# Altium PCB Merge_ESC_Board.PcbDoc (part 1 of 2)
Units mil, origin at the board's own origin, x right, y up, seen from the top; angles counter-clockwise.
Board outline 6950 x 3750 mil, 4 copper layers (Top Layer, Signal Layer 1, Signal Layer 2, Bottom Layer), stack 62.2 mil thick; 151 components, 93 nets, 546 pads, 134 vias.
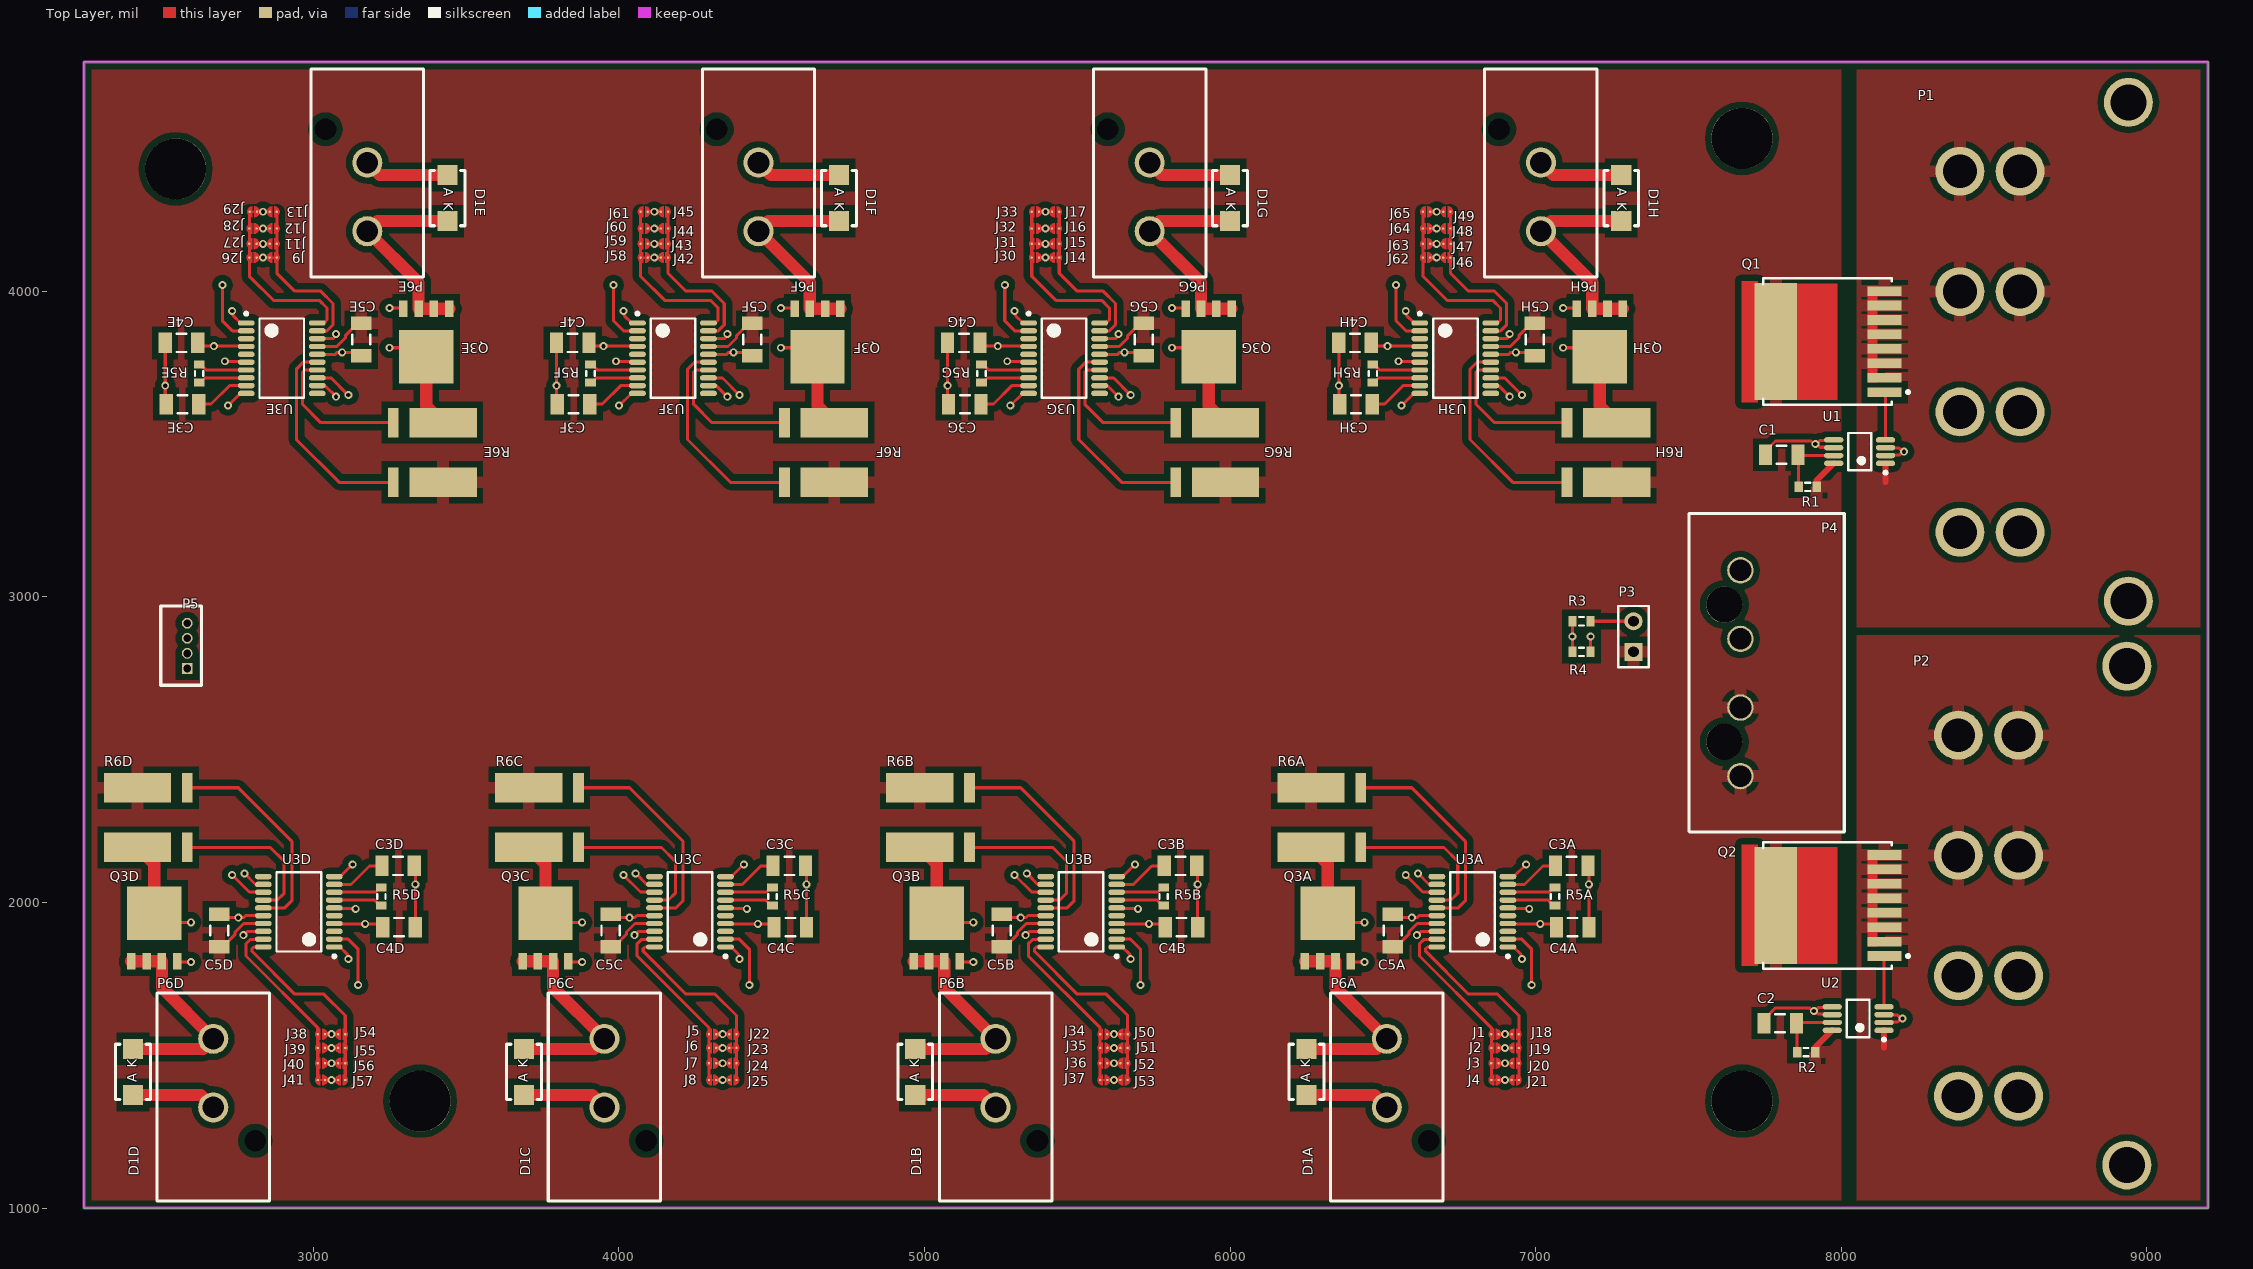
[diagram p0: Top Layer view]
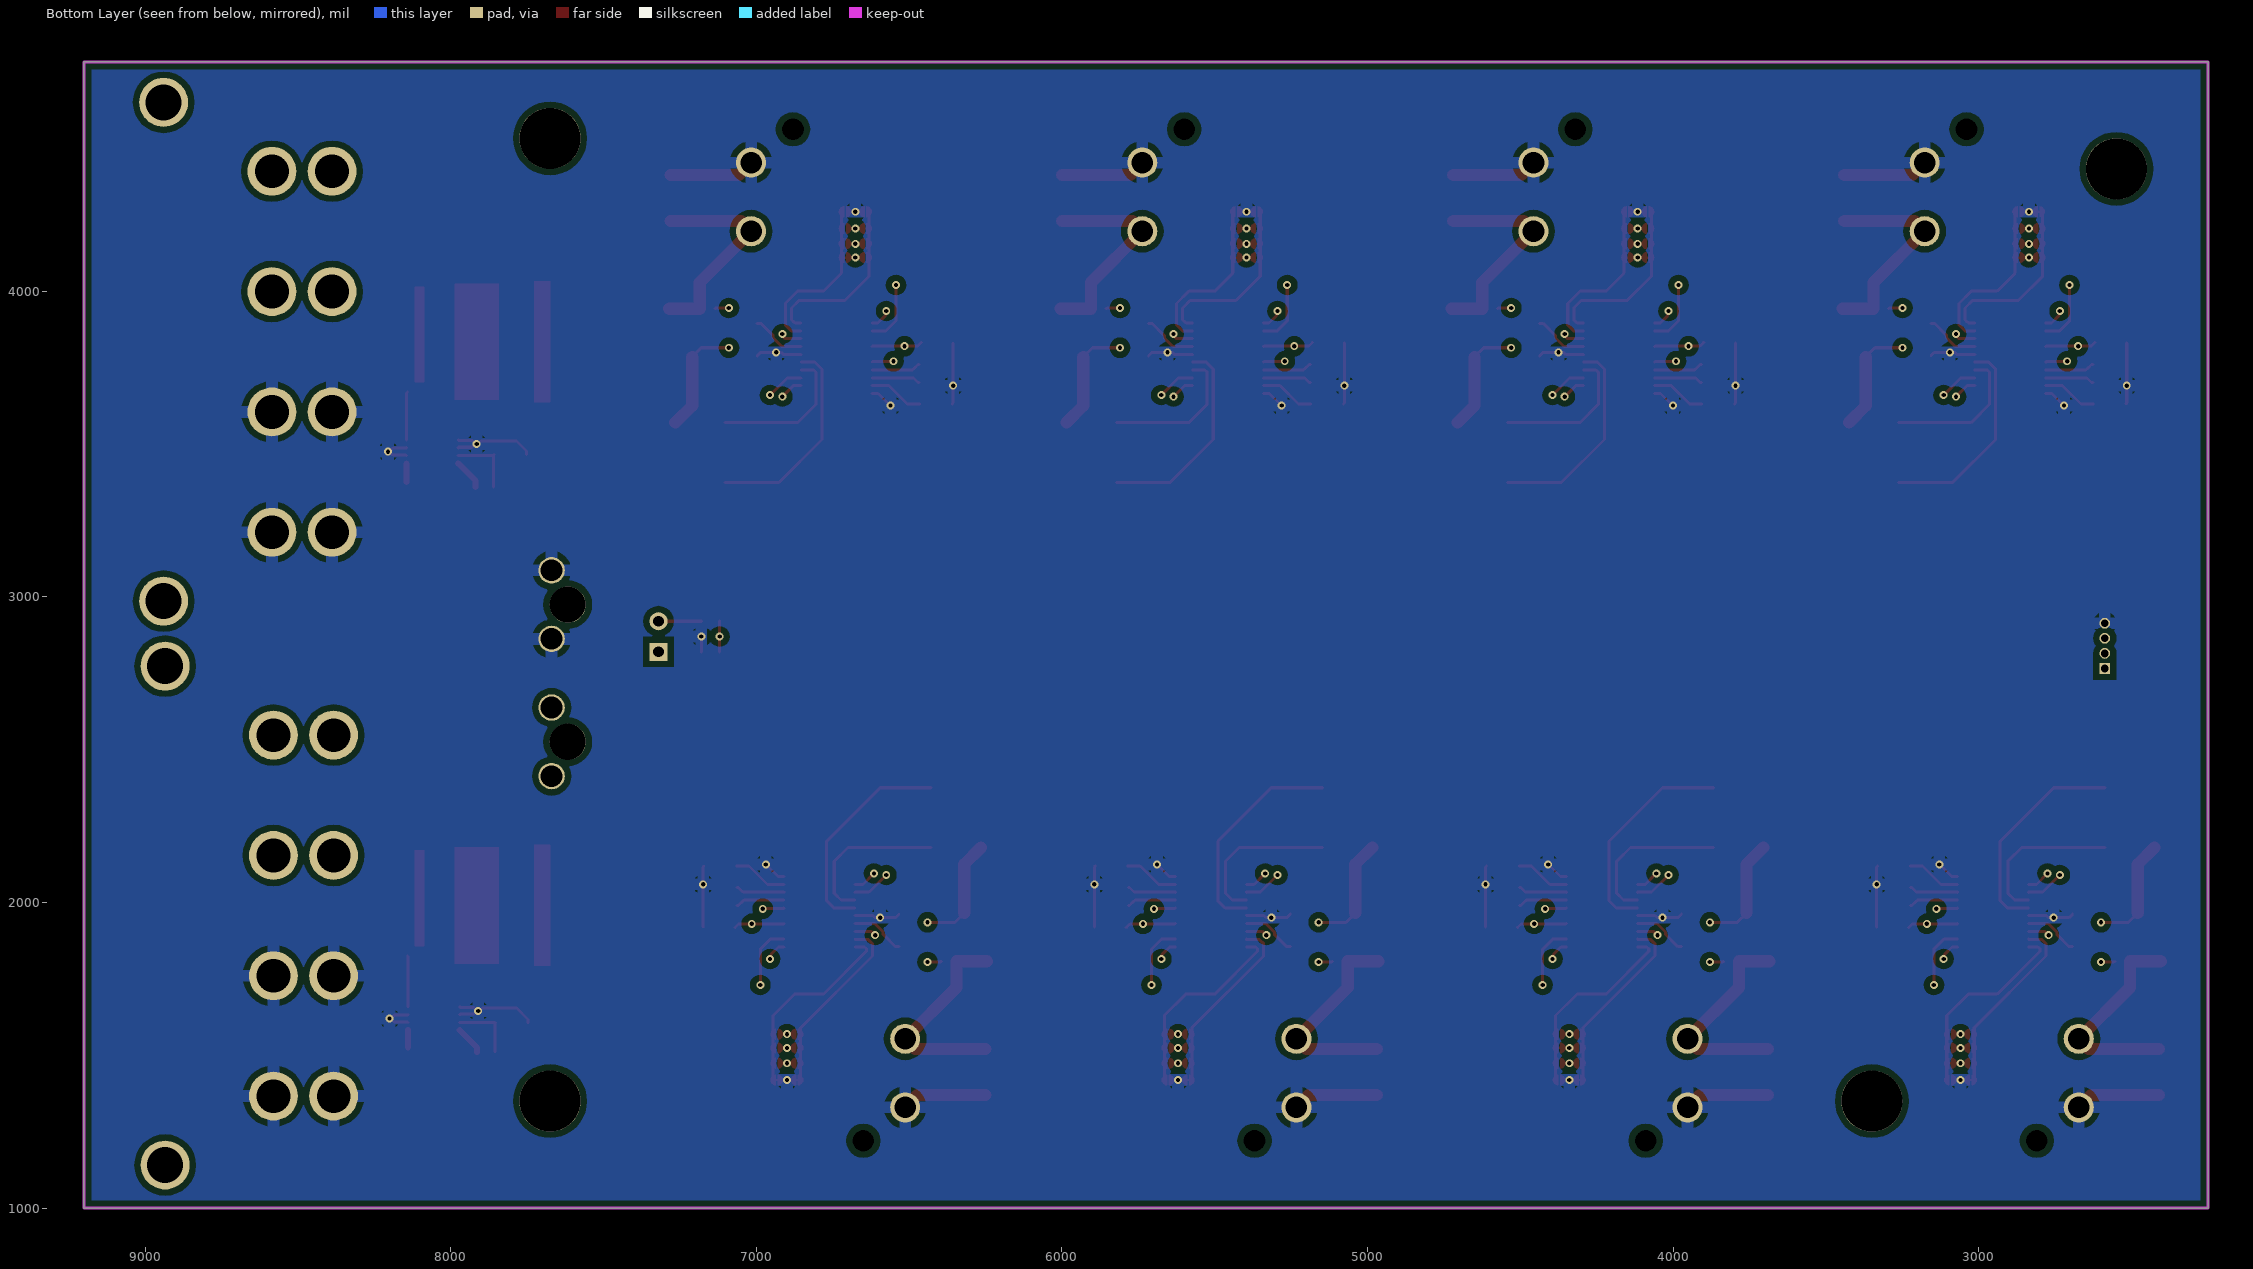
[diagram p1: Bottom Layer view, seen from below]
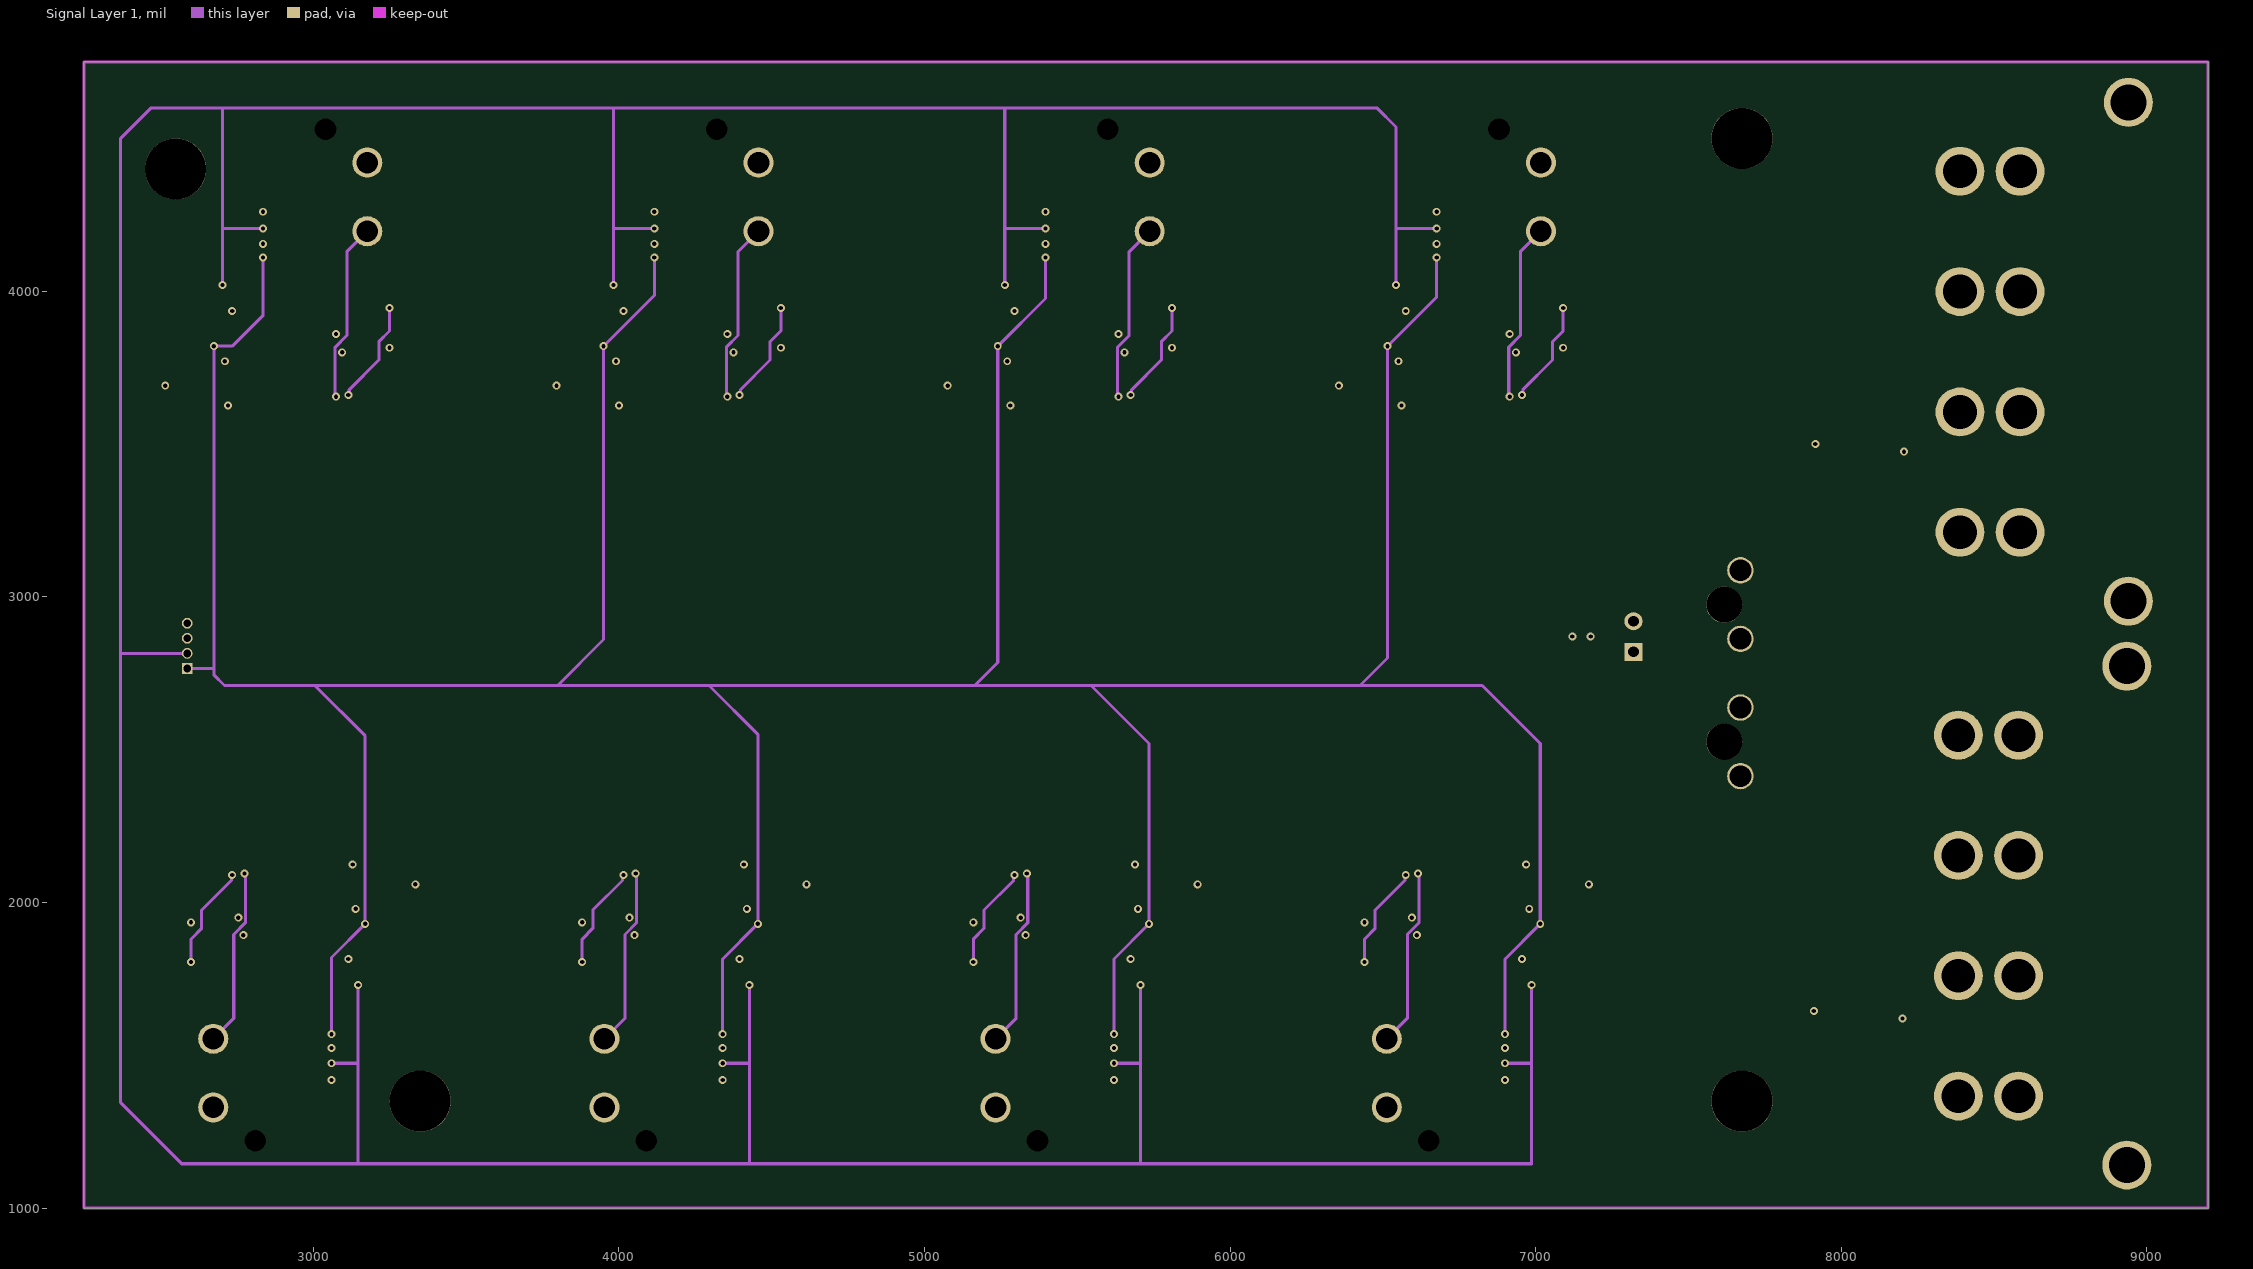
[diagram p2: Signal Layer 1]
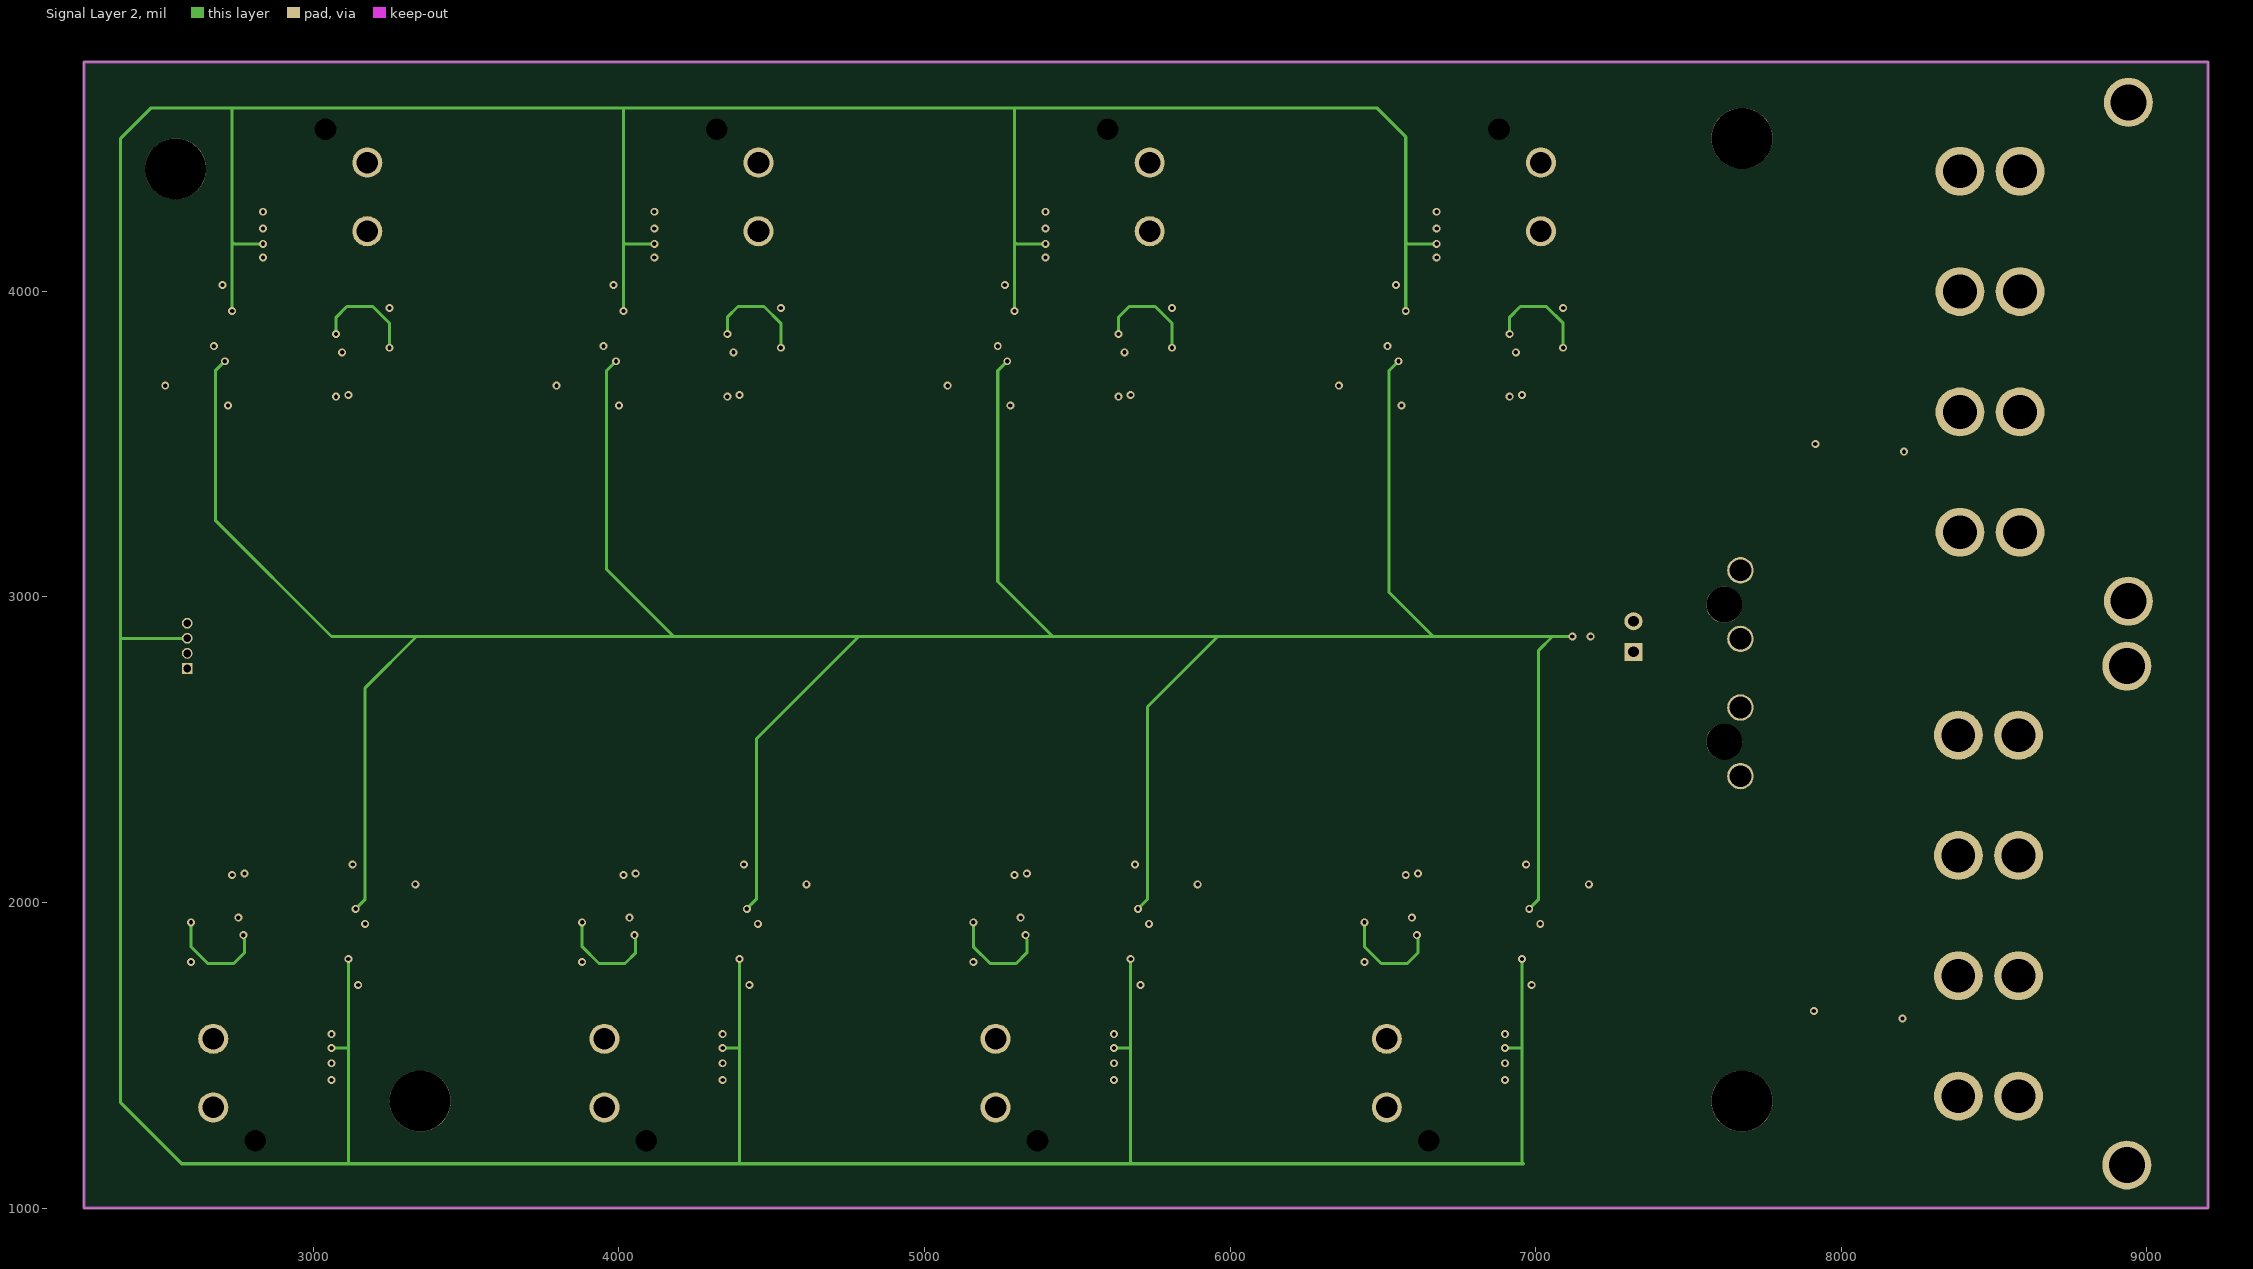
[diagram p3: Signal Layer 2]

## Layer stack, top to bottom
Top Solder: solder mask 0.4, Solder Resist, Dk 3.5
Top Layer: signal copper 1.4
Dielectric 1: core 8, FR-4, Dk 4.6
Signal Layer 1: signal copper 0.7
Dielectric 3: prepreg 42, Dk 4.6
Signal Layer 2: signal copper 0.7
Dielectric 2: core 8, Dk 4.6
Bottom Layer: signal copper 1.4
Bottom Solder: solder mask 0.4, Solder Resist, Dk 3.5

## Board outline
2250,1000 2250,4750 9200,4750 9200,1000

## Design rules (kind name [scope] priority, off if disabled: settings)
Clearance [All] p1: gap=5 ignorepadtopadclearanceinfootprint=FALSE except(20: Arc-Poly Track-Poly SMDPad-Poly THPad-Poly Via-Poly Fill-Poly Poly-Poly)
HoleSize [All] p1: absolutevalues=TRUE maxlimit=248 minlimit=8 maxpercent=80.000 minpercent=20.000
MinimumSolderMaskSliver [All] p1: minsoldermaskwidth=5
PlaneClearance [All] p1: clearance=30
PlaneConnect [All] p1: planeconnectstyle=Relief reliefexpansion=20 reliefentries=4 reliefconductorwidth=40 reliefairgap=10
PolygonConnect [All] p1: connectstyle=Relief reliefconductorwidth=40 reliefentries=4 polygonreliefangle="90 Angle" airgapwidth=20
RoomDefinition ESC4 [InComponentClass('ESC4')] p1: confinementstyle=ConfineIn formatcopy=TRUE lockcomponents=FALSE outline 2285,2575 3565,2575 3565,1000 2285,1000
RoomDefinition ESC7 [InComponentClass('ESC7')] p2: confinementstyle=ConfineIn formatcopy=TRUE lockcomponents=FALSE outline 6125,3175 4845,3175 4845,4750 6125,4750
RoomDefinition ESC6 [InComponentClass('ESC6')] p3: confinementstyle=ConfineIn formatcopy=TRUE lockcomponents=FALSE outline 4845,3175 3565,3175 3565,4750 4845,4750
RoomDefinition ESC5 [InComponentClass('ESC5')] p4: confinementstyle=ConfineIn formatcopy=TRUE lockcomponents=FALSE outline 3565,3175 2285,3175 2285,4750 3565,4750
RoomDefinition ESC8 [InComponentClass('ESC8')] p5: confinementstyle=ConfineIn formatcopy=TRUE lockcomponents=FALSE outline 7405,3175 6125,3175 6125,4750 7405,4750
RoomDefinition ESC1 [InComponentClass('ESC1')] p6: confinementstyle=ConfineIn formatcopy=TRUE lockcomponents=FALSE outline 6125,2575 7405,2575 7405,1000 6125,1000
RoomDefinition ESC2 [InComponentClass('ESC2')] p7: confinementstyle=ConfineIn formatcopy=TRUE lockcomponents=FALSE outline 4845,2575 6125,2575 6125,1000 4845,1000
RoomDefinition ESC3 [InComponentClass('ESC3')] p8: confinementstyle=ConfineIn formatcopy=TRUE lockcomponents=FALSE outline 3565,2575 4845,2575 4845,1000 3565,1000
RoutingVias [All] p1: holewidth=14 width=26 viastyle="Through Hole" minholewidth=14 minwidth=26 maxholewidth=28 maxwidth=50
SilkToSilkClearance [All] p1: silktosilkclearance=0
SilkToSolderMaskClearance [IsPad] p1: minsilkscreentomaskgap=0 clearancetoexposedcopper=TRUE
SolderMaskExpansion [All] p1: expansion=4 istentingtop=FALSE
Width [All] p1: maxlimit=50 minlimit=5 preferedwidth=10
24 further rules are at their usual default settings.

## Classes and differential pairs
component class ESC3: C3C C4C C5C D1C P6C Q3C R5C R6C U3C
component class ESC1: C3A C4A C5A D1A P6A Q3A R5A R6A U3A
component class ESC2: C3B C4B C5B D1B P6B Q3B R5B R6B U3B
component class ESC4: C3D C4D C5D D1D P6D Q3D R5D R6D U3D
component class ESC5: C3E C4E C5E D1E P6E Q3E R5E R6E U3E
component class ESC6: C3F C4F C5F D1F P6F Q3F R5F R6F U3F
component class ESC7: C3G C4G C5G D1G P6G Q3G R5G R6G U3G
component class ESC8: C3H C4H C5H D1H P6H Q3H R5H R6H U3H
component class Merge_ESC_Board: C1 C2 J1 J2 J3 J4 J5 J6 J7 J8 J9 J11 J12 J13 J14 J15 J16 J17 J18 J19 J20 J21 J22 J23 J24 J25 J26 J27 J28 J29 J30 J31 J32 J33 J34 J35 J36 J37 J38 J39 J40 J41 J42 J43 J44 J45 J46 J47 J48 J49 J50 J51 J52 J53 J54 J55 J56 J57 J58 J59 J60 J61 J62 J63 J64 J65 P1 P2 P3 P4 P5 Q1 Q2 R1 R2 R3 R4 U1 U2
channel class ESC_Header: ESC1 ESC2 ESC3 ESC4 ESC5 ESC6 ESC7 ESC8

## Components (designator, comment, footprint, x,y, rotation, side; value= is the part's Value field where it differs from the comment)
C1 "Cap Semi" C1206 7805,3465 r0 top value=1uF
C2 "Cap Semi" C1206 7800,1605 r0 top value=1uF
C3A "Cap Semi" C1206 7117.91,2119.37 r180 top value=0.01uF (schematic designator C3)
C3B "Cap Semi" C1206 5837.91,2119.37 r180 top value=0.01uF (schematic designator C3)
C3C "Cap Semi" C1206 4557.91,2119.37 r180 top value=0.01uF (schematic designator C3)
C3D "Cap Semi" C1206 3277.91,2119.37 r180 top value=0.01uF (schematic designator C3)
C3E "Cap Semi" C1206 2572.09,3630.63 r0 top value=0.01uF (schematic designator C3)
C3F "Cap Semi" C1206 3852.09,3630.63 r0 top value=0.01uF (schematic designator C3)
C3G "Cap Semi" C1206 5132.09,3630.63 r0 top value=0.01uF (schematic designator C3)
C3H "Cap Semi" C1206 6412.09,3630.63 r0 top value=0.01uF (schematic designator C3)
C4A "Cap Semi" C1206 7121.06,1919.37 r180 top value=0.01uF (schematic designator C4)
C4B "Cap Semi" C1206 5841.06,1919.37 r180 top value=0.01uF (schematic designator C4)
C4C "Cap Semi" C1206 4561.06,1919.37 r180 top value=0.01uF (schematic designator C4)
C4D "Cap Semi" C1206 3281.06,1919.37 r180 top value=0.01uF (schematic designator C4)
C4E "Cap Semi" C1206 2568.94,3830.63 r0 top value=0.01uF (schematic designator C4)
C4F "Cap Semi" C1206 3848.94,3830.63 r0 top value=0.01uF (schematic designator C4)
C4G "Cap Semi" C1206 5128.94,3830.63 r0 top value=0.01uF (schematic designator C4)
C4H "Cap Semi" C1206 6408.94,3830.63 r0 top value=0.01uF (schematic designator C4)
C5A "Cap Semi" C1206 6532.91,1908.43 r270 top value=0.01uF (schematic designator C5)
C5B "Cap Semi" C1206 5252.91,1908.43 r270 top value=0.01uF (schematic designator C5)
C5C "Cap Semi" C1206 3972.91,1908.43 r270 top value=0.01uF (schematic designator C5)
C5D "Cap Semi" C1206 2692.91,1908.43 r270 top value=0.01uF (schematic designator C5)
C5E "Cap Semi" C1206 3157.09,3841.57 r90 top value=0.01uF (schematic designator C5)
C5F "Cap Semi" C1206 4437.09,3841.57 r90 top value=0.01uF (schematic designator C5)
C5G "Cap Semi" C1206 5717.09,3841.57 r90 top value=0.01uF (schematic designator C5)
C5H "Cap Semi" C1206 6997.09,3841.57 r90 top value=0.01uF (schematic designator C5)
D1A "1N5819" 1N58XX 6250,1370 r90 top (schematic designator D1)
D1B "1N5819" 1N58XX 4970,1370 r90 top (schematic designator D1)
D1C "1N5819" 1N58XX 3690,1370 r90 top (schematic designator D1)
D1D "1N5819" 1N58XX 2410,1370 r90 top (schematic designator D1)
D1E "1N5819" 1N58XX 3440,4380 r270 top (schematic designator D1)
D1F "1N5819" 1N58XX 4720,4380 r270 top (schematic designator D1)
D1G "1N5819" 1N58XX 6000,4380 r270 top (schematic designator D1)
D1H "1N5819" 1N58XX 7280,4380 r270 top (schematic designator D1)
J1 "JumperOpen" JUMPER_OPEN 6866.81,1568.86 r0 top net-tie
J2 "JumperOpen" JUMPER_OPEN 6866.81,1523.86 r0 top net-tie
J3 "JumperOpen" JUMPER_OPEN 6866.81,1473.86 r0 top net-tie
J4 "JumperShorted" JUMPER_SHORT 6866.81,1418.86 r0 top net-tie
J5 "JumperOpen" JUMPER_OPEN 4306.81,1568.86 r0 top net-tie
J6 "JumperOpen" JUMPER_OPEN 4306.81,1523.86 r0 top net-tie
J7 "JumperOpen" JUMPER_OPEN 4306.81,1473.86 r0 top net-tie
J8 "JumperShorted" JUMPER_SHORT 4306.81,1418.86 r0 top net-tie
J9 "JumperShorted" JUMPER_SHORT 2869.33,4110 r180 top net-tie
J11 "JumperOpen" JUMPER_OPEN 2869.33,4155 r180 top net-tie
J12 "JumperOpen" JUMPER_OPEN 2869.33,4205 r180 top net-tie
J13 "JumperOpen" JUMPER_OPEN 2869.33,4260 r180 top net-tie
J14 "JumperShorted" JUMPER_SHORT 5429.33,4110 r180 top net-tie
J15 "JumperOpen" JUMPER_OPEN 5429.33,4155 r180 top net-tie
J16 "JumperOpen" JUMPER_OPEN 5429.33,4205 r180 top net-tie
J17 "JumperOpen" JUMPER_OPEN 5429.33,4260 r180 top net-tie
J18 "JumperOpen" JUMPER_OPEN 6933.19,1568.86 r180 top net-tie
J19 "JumperOpen" JUMPER_OPEN 6933.19,1523.86 r180 top net-tie
J20 "JumperOpen" JUMPER_OPEN 6933.19,1473.86 r180 top net-tie
J21 "JumperShorted" JUMPER_SHORT 6933.19,1418.86 r180 top net-tie
J22 "JumperOpen" JUMPER_OPEN 4373.19,1568.86 r180 top net-tie
J23 "JumperShorted" JUMPER_SHORT 4373.19,1523.86 r180 top net-tie
J24 "JumperOpen" JUMPER_OPEN 4373.19,1473.86 r180 top net-tie
J25 "JumperOpen" JUMPER_OPEN 4373.19,1418.86 r180 top net-tie
J26 "JumperOpen" JUMPER_OPEN 2802.95,4110 r0 top net-tie
J27 "JumperOpen" JUMPER_OPEN 2802.95,4155 r0 top net-tie
J28 "JumperOpen" JUMPER_OPEN 2802.95,4205 r0 top net-tie
J29 "JumperShorted" JUMPER_SHORT 2804.33,4260 r0 top net-tie
J30 "JumperOpen" JUMPER_OPEN 5362.95,4110 r0 top net-tie
J31 "JumperShorted" JUMPER_SHORT 5362.95,4155 r0 top net-tie
J32 "JumperOpen" JUMPER_OPEN 5362.95,4205 r0 top net-tie
J33 "JumperOpen" JUMPER_OPEN 5362.95,4260 r0 top net-tie
J34 "JumperOpen" JUMPER_OPEN 5586.81,1568.86 r0 top net-tie
J35 "JumperOpen" JUMPER_OPEN 5586.81,1523.86 r0 top net-tie
J36 "JumperOpen" JUMPER_OPEN 5586.81,1473.86 r0 top net-tie
J37 "JumperShorted" JUMPER_SHORT 5586.81,1418.86 r0 top net-tie
J38 "JumperOpen" JUMPER_OPEN 3026.81,1568.86 r0 top net-tie
J39 "JumperOpen" JUMPER_OPEN 3026.81,1523.86 r0 top net-tie
J40 "JumperOpen" JUMPER_OPEN 3026.81,1473.86 r0 top net-tie
J41 "JumperShorted" JUMPER_SHORT 3026.81,1418.86 r0 top net-tie
J42 "JumperShorted" JUMPER_SHORT 4149.33,4110 r180 top net-tie
J43 "JumperOpen" JUMPER_OPEN 4149.33,4155 r180 top net-tie
J44 "JumperOpen" JUMPER_OPEN 4149.33,4205 r180 top net-tie
J45 "JumperOpen" JUMPER_OPEN 4149.33,4260 r180 top net-tie
J46 "JumperShorted" JUMPER_SHORT 6709.33,4110 r180 top net-tie
J47 "JumperOpen" JUMPER_OPEN 6710,4155 r180 top net-tie
J48 "JumperOpen" JUMPER_OPEN 6709.33,4205 r180 top net-tie
J49 "JumperOpen" JUMPER_OPEN 6709.33,4260 r180 top net-tie
J50 "JumperShorted" JUMPER_SHORT 5653.19,1568.86 r180 top net-tie
J51 "JumperOpen" JUMPER_OPEN 5653.19,1523.86 r180 top net-tie
J52 "JumperOpen" JUMPER_OPEN 5653.19,1473.86 r180 top net-tie
J53 "JumperOpen" JUMPER_OPEN 5653.19,1418.86 r180 top net-tie
J54 "JumperOpen" JUMPER_OPEN 3093.19,1568.86 r180 top net-tie
J55 "JumperOpen" JUMPER_OPEN 3093.19,1523.86 r180 top net-tie
J56 "JumperShorted" JUMPER_SHORT 3093.19,1473.86 r180 top net-tie
J57 "JumperOpen" JUMPER_OPEN 3093.19,1418.86 r180 top net-tie
J58 "JumperShorted" JUMPER_SHORT 4082.95,4110 r0 top net-tie
J59 "JumperOpen" JUMPER_OPEN 4082.95,4155 r0 top net-tie
J60 "JumperOpen" JUMPER_OPEN 4082.95,4205 r0 top net-tie
J61 "JumperOpen" JUMPER_OPEN 4082.95,4260 r0 top net-tie
J62 "JumperOpen" JUMPER_OPEN 6642.95,4110 r0 top net-tie
J63 "JumperOpen" JUMPER_OPEN 6642.95,4155 r0 top net-tie
J64 "JumperShorted" JUMPER_SHORT 6642.95,4205 r0 top net-tie
J65 "JumperOpen" JUMPER_OPEN 6642.95,4260 r0 top net-tie
P1 "Molex42820-4224" MOLEX42820-4224 8585,3211.3 r90 top
P2 "Molex42820-4224" MOLEX42820-4224 8580,1366.3 r90 top
P3 "Header 2" HDR1X2 7320,2820 r90 top
P4 "200241-1114" MOLEX2002411114 7670,2750 r270 top
P5 "Header 4" DF13-4P-1.25DSA 2587.8,2765.79 r90 top
P6A "Motor ?" 76829-0102 6696.77,1703.78 r180 top (schematic designator P6)
P6B "Motor ?" 76829-0102 5416.77,1703.78 r180 top (schematic designator P6)
P6C "Motor ?" 76829-0102 4136.77,1703.78 r180 top (schematic designator P6)
P6D "Motor ?" 76829-0102 2856.77,1703.78 r180 top (schematic designator P6)
P6E "Motor ?" 76829-0102 2993.23,4046.22 r0 top (schematic designator P6)
P6F "Motor ?" 76829-0102 4273.23,4046.22 r0 top (schematic designator P6)
P6G "Motor ?" 76829-0102 5553.23,4046.22 r0 top (schematic designator P6)
P6H "Motor ?" 76829-0102 6833.23,4046.22 r0 top (schematic designator P6)
Q1 "IPT004N03L" INF-PG-HSOF-8-1_V 7935,3835 r180 top
Q2 "IPT004N03L" INF-PG-HSOF-8-1_V 7935,1990 r180 top
Q3A "CSD16570Q5B" CSD16570Q5B 6245,1807.28 r270 top (schematic designator Q3)
Q3B "CSD16570Q5B" CSD16570Q5B 4965,1807.28 r270 top (schematic designator Q3)
Q3C "CSD16570Q5B" CSD16570Q5B 3685,1807.28 r270 top (schematic designator Q3)
Q3D "CSD16570Q5B" CSD16570Q5B 2405,1807.28 r270 top (schematic designator Q3)
Q3E "CSD16570Q5B" CSD16570Q5B 3445,3942.72 r90 top (schematic designator Q3)
Q3F "CSD16570Q5B" CSD16570Q5B 4725,3942.72 r90 top (schematic designator Q3)
Q3G "CSD16570Q5B" CSD16570Q5B 6005,3942.72 r90 top (schematic designator Q3)
Q3H "CSD16570Q5B" CSD16570Q5B 7285,3942.72 r90 top (schematic designator Q3)
R1 "Res3" J1-0603 7890,3360 r0 top value=100
R2 "Res3" J1-0603 7885,1510 r0 top value=100
R3 "Res3" J1-0603 7150,2920 r0 top value=100k
R4 "Res3" J1-0603 7150,2820 r180 top value=100k
R5A "47k" J1-0603 7062.91,2019.37 r270 top (schematic designator R5)
R5B "47k" J1-0603 5782.91,2019.37 r270 top (schematic designator R5)
R5C "47k" J1-0603 4502.91,2019.37 r270 top (schematic designator R5)
R5D "47k" J1-0603 3222.91,2019.37 r270 top (schematic designator R5)
R5E "47k" J1-0603 2627.09,3730.63 r90 top (schematic designator R5)
R5F "47k" J1-0603 3907.09,3730.63 r90 top (schematic designator R5)
R5G "47k" J1-0603 5187.09,3730.63 r90 top (schematic designator R5)
R5H "47k" J1-0603 6467.09,3730.63 r90 top (schematic designator R5)
R6A "2m" WSL27262L000FEB 6300.04,2277.64 r270 top (schematic designator R6)
R6B "2m" WSL27262L000FEB 5020.04,2277.64 r270 top (schematic designator R6)
R6C "2m" WSL27262L000FEB 3740.04,2277.64 r270 top (schematic designator R6)
R6D "2m" WSL27262L000FEB 2460.04,2277.64 r270 top (schematic designator R6)
R6E "2m" WSL27262L000FEB 3389.96,3472.36 r90 top (schematic designator R6)
R6F "2m" WSL27262L000FEB 4669.96,3472.36 r90 top (schematic designator R6)
R6G "2m" WSL27262L000FEB 5949.96,3472.36 r90 top (schematic designator R6)
R6H "2m" WSL27262L000FEB 7229.96,3472.36 r90 top (schematic designator R6)
U1 "LTC4357" LT-MS8-8_N 8060,3475 r180 top
U2 "LTC4357" LT-MS8-8_N 8055,1620 r180 top
U3A "TPS2481" TPS2481 6792.91,1969.37 r180 top (schematic designator U3)
U3B "TPS2481" TPS2481 5512.91,1969.37 r180 top (schematic designator U3)
U3C "TPS2481" TPS2481 4232.91,1969.37 r180 top (schematic designator U3)
U3D "TPS2481" TPS2481 2952.91,1969.37 r180 top (schematic designator U3)
U3E "TPS2481" TPS2481 2897.09,3780.63 r0 top (schematic designator U3)
U3F "TPS2481" TPS2481 4177.09,3780.63 r0 top (schematic designator U3)
U3G "TPS2481" TPS2481 5457.09,3780.63 r0 top (schematic designator U3)
U3H "TPS2481" TPS2481 6737.09,3780.63 r0 top (schematic designator U3)

## Footprints (in the part's own frame and the unit in brackets; to place one, negate y for a bottom-side part, rotate by r counter-clockwise, add the part's x,y. Pads: shape width x height; smd on the part's side, far side on the other; paste and mask are expansions set on the pad)
1N58XX [mm] "1A Schottky Barrier Rectifier Diode"
  rect 1.655x1.67 smd: A(0,0) K(3.83,0)
  silkscreen extent -0.39,-1.45 4.22,1.45, body extent -0.4,-2 4.2,1.45, height 2.4
76829-0102 [mm] "molex 2 circuit connector megafit slim"
  round 2.5 hole 1.8 mask+0.3: 1(4.67,3.81) 2(4.67,9.51)
  round 0 hole 1.8 unplated: ""(1.19,12.28)
  silkscreen extent 0,0 9.34,17.28, body extent 0.5,0.5 8.85,14.54, height 16.95
C1206 [mm] "Chip Capacitor, Body 3.2x1.6mm, IPC High Density"
  rect 1.1x1.7 smd: 1(-1.35,0) 2(1.35,0)
  silkscreen extent -0.4,-0.75 0.4,0.75, body extent -1.7,-0.9 1.7,0.9, height 1.3
CSD16570Q5B [mm] "MOSFET N-CH 25V 100A 8VSON"
  rect 4.44x4.52 smd: D(-4.006,1.905)
  rect 1.372x0.71 smd: G(0,3.81) S(0,2.54) S(0,1.27) S(0,0)
  body extent -5.8,-0.6 0.2,4.4, height 1
DF13-4P-1.25DSA [mm] "Depth Sensor Header footprint"
  rect 0.9x0.9 hole 0.65: 1(0,0)
  round 0.9 hole 0.65: 2(1.25,0) 3(2.5,0) 4(3.75,0)
  silkscreen extent -1.4,-1.2 5.2,2.2, body extent -1.43,-1.2 5.23,2.2, height 4.27
HDR1X2 [mm] "Connector; Header; 2 Position"
  rect 1.5x1.5 hole 0.9: 1(0,0)
  round 1.5 hole 0.9: 2(2.54,0)
  silkscreen extent -1.27,-1.27 3.81,1.27
INF-PG-HSOF-8-1_V [mm]
  rect 2.8x0.8 smd: 1(-5.249,4.2) 2(-5.249,3) 3(-5.249,1.8) 4(-5.249,0.6) 5(-5.249,-0.6) 6(-5.249,-1.8) 7(-5.249,-3) 8(-5.249,-4.2)
  rect 3.556x9.703 smd: 9(3.8,0)
  Top Layer region: -1.35,4.85 -1.35,-4.85 2.35,-4.85 2.35,4.85
  Top Layer region: 5.25,5.05 5.25,-5.05 6.65,-5.05 6.65,5.05
  Top Layer region: -4.65,3.4 -4.65,-4.6 -3.85,-4.6 -3.85,3.4
  silkscreen extent -7.32,-5.25 4.85,5.25, body extent -5.84,-4.95 5.84,4.95, height 2.4
J1-0603 [mm] "Chip Resistor, Body 1.6x0.8mm, IPC High Density"
  rect 0.7x0.9 smd: 1(-0.75,0) 2(0.75,0)
  silkscreen extent -0.2,-0.35 0.2,0.35, body extent -0.85,-0.48 0.85,0.48, height 0.9
JUMPER_OPEN [mm] "Jumper (Default Open)"
  round 0.2 smd mask-4: 1(-0.3,0) 2(0.3,0)
  Top Layer region: 0.075,0.45 0.247,0.416 0.393,0.318 0.491,0.172 0.525,0 0.525,0 0.491,-0.172 0.393,-0.318 0.247,-0.416 0.075,-0.45 0.075,-0.45
  Top Layer region: -0.075,0.45 -0.247,0.416 -0.393,0.318 -0.491,0.172 -0.525,0 -0.525,0 -0.491,-0.172 -0.393,-0.318 -0.247,-0.416 -0.075,-0.45 -0.075,-0.45
JUMPER_SHORT [mm] "Jumper (Default Short)"
  round 0.2 smd mask-4: 1(-0.3,0) 2(0.3,0)
  Top Layer region: -0.2,-0.1 0.2,-0.1 0.2,0.1 -0.2,0.1
  Top Layer region: -0.075,0.45 -0.247,0.416 -0.393,0.318 -0.491,0.172 -0.525,0 -0.525,0 -0.491,-0.172 -0.393,-0.318 -0.247,-0.416 -0.075,-0.45 -0.075,-0.45
  Top Layer region: 0.075,0.45 0.247,0.416 0.393,0.318 0.491,0.172 0.525,0 0.525,0 0.491,-0.172 0.393,-0.318 0.247,-0.416 0.075,-0.45 0.075,-0.45
LT-MS8-8_N [mm] "Positive High Voltage Ideal Diode Controller, 9 to 80 V Vin, 8-pin SOP (MS8-8), 0 to 70 degC, Pb-Free"
  oval 1.6x0.45 smd: 1(-2.15,0.975) 2(-2.15,0.325) 3(-2.15,-0.325) 4(-2.15,-0.975) 5(2.15,-0.975) 6(2.15,-0.325) 7(2.15,0.325) 8(2.15,0.975)
  silkscreen extent -2.28,-1.55 0.95,1.87, body extent -1.55,-1.55 1.55,1.55, height 1.1
MOLEX42820-4224 [mm]
  round 4.064 hole 2.8: 1(0,5) 1(0,0) 2(10,0) 2(10,5) 3(20,0) 3(20,5) 4(30,0) 4(30,5)
  round 4.064 hole 3 unplated: ""(-5.73,-9) ""(35.73,-9)
  body extent -6.92,-22.62 36.9,5.98, height 15
MOLEX2002411114 [mm]
  round 2.2 hole 1.8: 1(-8.55,0) 2(-2.85,0) 3(2.85,0) 4(8.55,0)
  round 3 hole 3 unplated: ""(-5.7,-1.34) ""(5.7,-1.34)
  silkscreen extent -13.28,-4.27 13.21,8.63, body extent -11.72,-3.39 11.73,7.21, height 17.5
TPS2481 [mm]
  oval 1.4x0.45 smd: 1(-2.95,2.925) 2(-2.95,2.275) 3(-2.95,1.625) 4(-2.95,0.975) 5(-2.95,0.325) 6(-2.95,-0.325) 7(-2.95,-0.975) 8(-2.95,-1.625) 9(-2.95,-2.275) 10(-2.95,-2.925) 11(2.95,-2.925) 12(2.95,-2.275) 13(2.95,-1.625) 14(2.95,-0.975) 15(2.95,-0.325) 16(2.95,0.325) 17(2.95,0.975) 18(2.95,1.625) 19(2.95,2.275) 20(2.95,2.925)
  silkscreen extent -3.08,-3.3 1.85,3.82, body extent -2.25,-3.3 2.25,3.3, height 1.2
WSL27262L000FEB [mm] "2 mOhms ±1% 3W Chip Resistor Nonstandard Anti-Sulfur, Automotive AEC-Q200, Current Sense, Moisture Resistant, Pulse Withstanding Metal Element"
  rect 2.44x5.6 smd: 1(-2.48,-0.89) 2(2.48,-0.89)
  rect 2.44x0.89 smd: 3(-2.48,3.245) 4(2.48,3.245)
  body extent -3.45,-3 3.45,3.6, height 2.91

## Part data
C1 C2 C3A C3B C3C C3D C3E C3F C3G C3H C4A C4B C4C C4D C4E C4F C4G C4H C5A C5B C5C C5D C5E C5F C5G C5H: "Capacitor (Semiconductor SIM Model)", LatestRevisionDate=29-May-2009, LatestRevisionNote="IPC-7351 Footprint Added.", PackageDescription="Chip Capacitor", PackageReference=C1206, Published=8-Jun-2000, Publisher="Altium Limited"
D1A D1B D1C D1D D1E D1F D1G D1H: library part 1N58xx, "1A Schottky Barrier Rectifier Diode", Datasheet=http://www.kesenes.com/pdf/1n5817-1n5819.pdf
J1 J2 J3 J5 J6 J7 J11 J12 J13 J15 J16 J17 J18 J19 J20 J22 J24 J25 J26 J27 J28 J30 J32 J33 J34 J35 J36 J38 J39 J40 J43 J44 J45 J47 J48 J49 J51 J52 J53 J54 J55 J57 J59 J60 J61 J62 J63 J65: "Jumper (Default Open)"
J4 J8 J9 J14 J21 J23 J29 J31 J37 J41 J42 J46 J50 J56 J58 J64: "Jumper (Default Shorted)"
P1 P2: Supplier Part Number 1=0428204224-ND, ComponentLink1Description=DataSheet, ComponentLink1URL=https://www.molex.com/pdm_docs/sd/428204224_sd.pdf, Supplier 1=Digi-Key
P3: "Header, 2-Pin", LatestRevisionDate=17-Jul-2002, LatestRevisionNote="Re-released for DXP Platform.", Publisher="Altium Limited"
P4: library part Molex2002411114
P5: "Header, 4-Pin", LatestRevisionDate=17-Jul-2002, LatestRevisionNote="Re-released for DXP Platform.", Publisher="Altium Limited"
P6A P6B P6C P6D P6E P6F P6G P6H: library part "Megafit Slim Vert 2 Peg", mfgr_part_num=76829-0102
Q1 Q2: "N-Channel OptiMOS(TM) Power-MOSFET, 30 V VDS, 300 A ID, -55 to 175 degC, PG-HSOF-8, Reel, Green", Manufacturer=Infineon, Supplier Part Number 1=N/A, ComponentLink1Description="Manufacturer URL", ComponentLink1URL=http://www.infineon.com/, ComponentLink2Description=Datasheet, ComponentLink2URL=http://www.infineon.com/dgdl/IPT004N03L_rev1.2.pdf?folderId=db3a304313b8b5a60113cee8763b02d7&fileId=db3a30433e9d5d11013e9e0f382600c2, ComponentLink3Description="Package Specification", ComponentLink3URL=http://www.infineon.com/cms/packages/SMD_-_Surface_Mounted_Devices/P-PG-HSOF/P-PG-HSOF-08-1.html?__locale=en, DatasheetVersion="Rev. 1.2", Green=TRUE, Halogen-free=TRUE, ID (max)="300 A", IDpuls (max)="1,200 A", Mounting Technology="Surface Mount", PackageDescription="8-Pin Plastic (Green) Heatlink Small Outline Flat Leads Package, 10.375 x 9.9 mm Body, 0.8 mm Pitch", PackageReference=PG-HSOF-8-1, PackageVersion="Rev. 04", Packing=Reel, PartNumber=IPT004N03L, Polarity=FALSE, Ptot (max)="300 W", QG="122 nC", RDS (on) (max)="0.4 mOhm", RthJA (max)="40 K/W", RthJC (max)="0.5 K/W", Supplier 1=Mouser, Technology=OptiMOS(TM), VDS (max)="30 V", VGS(th) (max)="2.2 V", VGS(th) (min)="0.7 V"
Q3A Q3B Q3C Q3D Q3E Q3F Q3G Q3H: "MOSFET N-CH 25V 100A 8VSON", Manufacturer="Texas Instruments", Supplier Part Number 1=296-47753-1-ND, ComponentLink1Description="Manufacturer URL", ComponentLink1URL=http://www.ti.com/, ComponentLink2Description=Datasheet, ComponentLink2URL=http://www.ti.com/lit/ds/symlink/csd16570q5b.pdf, Digikey Link=https://www.digikey.com/product-detail/en/texas-instruments/CSD16570Q5B/296-47753-1-ND/8133102, ID (max)="100 A", Mounting Technology="Surface Mount", Packing=Reel, PartNumber=CSD16570Q5B, QG="250 nC", RDS (on) (max)="0.59 mOhm", Supplier 1=Digikey, VDS (max)="25 V", VGS (max)="20 V", VGS(th) (max)="1.9 V"
R1 R2 R3 R4: "Resistor", LatestRevisionDate=29-May-2009, LatestRevisionNote="IPC-7351 Footprint Added.", PackageDescription="Chip Resistor", PackageReference=J1-0603, Published=8-Jun-2000, Publisher="Altium Limited"
R5A R5B R5C R5D R5E R5F R5G R5H: library part Res3, "Resistor", LatestRevisionDate=29-May-2009, LatestRevisionNote="IPC-7351 Footprint Added.", PackageDescription="Chip Resistor", PackageReference=J1-0603, Published=8-Jun-2000, Publisher="Altium Limited"
R6A R6B R6C R6D R6E R6F R6G R6H: library part WSL27262L000FEB, "2 mOhms ±1% 3W Chip Resistor Nonstandard Anti-Sulfur, Automotive AEC-Q200, Current Sense, Moisture Resistant, Pulse Withstanding Metal Element", Datasheet Link=http://www.vishay.com/docs/30131/wsl2726.pdf, Digikey Link=https://www.digikey.com/product-detail/en/vishay-dale/WSL27262L000FEB/WSLQ-.002CT-ND/2695218
U1 U2: library part LTC4357CMS8#PBF, "Positive High Voltage Ideal Diode Controller, 9 to 80 V Vin, 8-pin SOP (MS8-8), 0 to 70 degC, Pb-Free", Manufacturer="Linear Technology", Supplier Part Number 1=LTC4357CMS8#PBF-ND, ComponentLink1Description="Manufacturer URL", ComponentLink1URL=http://www.linear.com/, ComponentLink2Description=Datasheet, ComponentLink2URL=http://cds.linear.com/docs/en/datasheet/4357fd.pdf, ComponentLink3Description="Package Specification", ComponentLink3URL=http://cds.linear.com/docs/en/packaging/05081660_G_MS8.pdf, DatasheetVersion="Rev. D", Ideal Diode="Single, External, N-Channel", Mounting Technology="Surface Mount", PackageDescription="8-Pin Plastic MSOP, Body 3 x 3 mm, Pitch 0.65 mm", PackageReference=MS8-8, PackageVersion="Rev. G, 03/2012", PartNumber=LTC4357CMS8#PBF, RoHS=TRUE, Supplier 1=Digi-Key, Supplier 2=Farnell, Supplier 3=Newark, Supplier Part Number 2=1432779, Supplier Part Number 3=56M9468
U3A U3B U3C U3D U3E U3F U3G U3H: "Positive voltage, intelligent protection device/hotswap controller and I2C current monitor", Datasheet_Link=http://www.ti.com/lit/ds/symlink/tps2481.pdf, Digikey_Link=https://www.digikey.com/product-detail/en/texas-instruments/TPS2481PWR/296-27643-1-ND/2345432

## Free pads (board coordinates)
  round 200 hole 200 unplated: ""(2550,4400) ""(3350,1350) ""(7675,1350) ""(7675,4500)

## Via types
v1: diameter 26, hole 14, Top Layer to Bottom Layer, tented both sides, 102 vias
v2: diameter 26, hole 14, Top Layer to Bottom Layer, 32 vias

## Nets (pads, with @x,y where several pads share a name; then routed paths per layer and width w, separated by ;. In a path a pad name is that pad's centre, name@x,y a point inside that pad or via, vN(x,y) a via of type N, cw(c..) or ccw(c..) an arc to the next point about the centre after c; other vN are vias at no path point)
3V3: C4A.2 C4B.2 C4C.2 C4D.2 C4E.2 C4F.2 C4G.2 C4H.2 J1.2 J5.2 J9.2 J14.2 J18.2 J22.2 J26.2 J30.2 J34.2 J38.2 J42.2 J46.2 J50.2 J54.2 J58.2 J62.2 P5.1 U3A.4 U3B.4 U3C.4 U3D.4 U3E.4 U3F.4 U3G.4 U3H.4 | length 16969.4
  Top Layer w10: C4E.2@2620,3832.72 C4E.2@2622.09,3830.63 2631.93,3820.79 2738.95,3820.79 2739.24,3820.49 2779.47,3820.49 U3E.4@2780.95,3819.02 ; J26.2@2814.76,4110 v1(2836.14,4110) J9.2@2857.52,4110 ; J38.2@3038.62,1568.86 v1(3060,1568.86) J54.2@3081.38,1568.86 ; U3D.4@3069.05,1930.98 3070.53,1929.51 3110.76,1929.51 3111.05,1929.21 3218.07,1929.21 C4D.2@3227.91,1919.37 C4D.2@3230,1917.28 ; C4F.2@3900,3832.72 C4F.2@3902.09,3830.63 3911.93,3820.79 4018.95,3820.79 4019.24,3820.49 4059.47,3820.49 U3F.4@4060.95,3819.02 ; J58.2@4094.76,4110 v1(4116.14,4110) J42.2@4137.52,4110 ; J5.2@4318.62,1568.86 v1(4340,1568.86) J22.2@4361.38,1568.86 ; U3C.4@4349.06,1930.98 4350.53,1929.51 4390.76,1929.51 4391.06,1929.21 4498.07,1929.21 C4C.2@4507.91,1919.37 C4C.2@4510,1917.28 ; C4G.2@5180,3832.72 C4G.2@5182.09,3830.63 5191.93,3820.79 5298.94,3820.79 5299.24,3820.49 5339.47,3820.49 U3G.4@5340.94,3819.02 ; J30.2@5374.76,4110 v1(5396.14,4110) J14.2@5417.52,4110 ; J34.2@5598.62,1568.86 v2(5620,1568.86) J50.2@5641.38,1568.86 ; U3B.4@5629.06,1930.98 5630.53,1929.51 5670.76,1929.51 5671.06,1929.21 5778.07,1929.21 C4B.2@5787.91,1919.37 C4B.2@5790,1917.28 ; C4H.2@6460,3832.72 C4H.2@6462.09,3830.63 6471.93,3820.79 6578.94,3820.79 6579.24,3820.49 6619.47,3820.49 U3H.4@6620.94,3819.02 ; J62.2@6654.76,4110 v2(6676.14,4110) J46.2@6697.52,4110 ; J1.2@6878.62,1568.86 v1(6900,1568.86) J18.2@6921.38,1568.86 ; U3A.4@6909.06,1930.98 6910.53,1929.51 6950.76,1929.51 6951.06,1929.21 7058.07,1929.21 C4A.2@7067.91,1919.37 C4A.2@7070,1917.28
  Signal Layer 1 w10: P5.1@2587.8,2765.79 2675,2765.79 ; v1(2836.14,4110) 2836.14,3921.14 2735,3820 v1(2675,3820) 2675,2765.79 ; v1(3060,1568.86) 3060,1820 v1(3170,1930) 3170,2545 3005,2710 ; v1(4116.14,4110) 4116.14,3986.14 v1(3950,3820) 3950,2860 3800,2710 ; v1(4340,1568.86) 4340,1815 v1(4455,1930) 4455,2550 4295,2710 ; v1(5396.14,4110) 5396.14,3976.14 v1(5240,3820) 5240,2785 5165,2710 ; v2(5620,1568.86) 5620,1815 v2(5735,1930) 5735,2520 5545,2710 ; v2(6676.14,4110) 6676.14,3981.14 v2(6515,3820) 6515,2800 6425,2710 ; v1(6900,1568.86) 6900,1815 v1(7015,1930) 7015,2520 6825,2710 6425,2710 ; 2675,2765.79 2675,2745 2710,2710 3005,2710 ; 3005,2710 3800,2710 ; 3800,2710 4295,2710 ; 4295,2710 5165,2710 ; 5165,2710 5545,2710 ; 5545,2710 6425,2710
GND: C1.1 C2.1 C3A.1 C3B.1 C3C.1 C3D.1 C3E.1 C3F.1 C3G.1 C3H.1 C4A.1 C4B.1 C4C.1 C4D.1 C4E.1 C4F.1 C4G.1 C4H.1 C5A.1 C5B.1 C5C.1 C5D.1 C5E.1 C5F.1 C5G.1 C5H.1 D1A.A D1B.A D1C.A D1D.A D1E.A D1F.A D1G.A D1H.A J4.2 J8.2 J13.2 J17.2 J21.2 J25.2 J29.2 J33.2 J37.2 J41.2 J45.2 J49.2 J53.2 J57.2 J61.2 J65.2 P1.1 P1.2 P2.1 P2.2 P4.1 P4.2 P5.4 P6A.2 P6B.2 P6C.2 P6D.2 P6E.2 P6F.2 P6G.2 P6H.2 R4.1 U1.2 U1.3 U1.5 U1.6 U2.2 U2.3 U2.5 U2.6 U3A.10 U3A.16 U3B.10 U3B.16 U3C.10 U3C.16 U3D.10 U3D.16 U3E.10 U3E.16 U3F.10 U3F.16 U3G.10 U3G.16 U3H.10 U3H.16 | length 6965
  Top Layer w10: C4E.1@2515.79,3830.63 2515.95,3830.47 v1(2515.95,3690.79) 2515.95,3633.62 C3E.1@2518.94,3630.63 ; C5D.1@2692.91,1961.57 2704.49,1950 v1(2755,1950) 2771.34,1950 2778.84,1957.5 2835.85,1957.5 U3D.16@2836.77,1956.57 ; v1(2720.95,3625.79) 2721.75,3625.79 2761.44,3665.47 U3E.10@2780.95,3665.47 ; J29.2@2814.76,4260 J13.2@2857.52,4260 ; U3E.16@3013.23,3793.43 3014.15,3792.5 3071.16,3792.5 3078.66,3800 v1(3095,3800) 3145.51,3800 C5E.1@3157.09,3788.43 ; J41.2@3038.62,1418.86 J57.2@3081.38,1418.86 ; U3D.10@3069.05,2084.53 3088.56,2084.53 3128.25,2124.21 v1(3129.05,2124.21) ; C3D.1@3331.06,2119.37 3334.05,2116.38 v1(3334.05,2059.21) 3334.05,1919.53 C4D.1@3334.21,1919.37 ; C4F.1@3795.79,3830.63 3795.95,3830.47 v1(3795.95,3690.79) 3795.95,3633.62 C3F.1@3798.94,3630.63 ; C5C.1@3972.91,1961.57 3984.49,1950 v1(4035,1950) 4051.34,1950 4058.84,1957.5 4115.85,1957.5 U3C.16@4116.77,1956.57 ; v1(4000.95,3625.79) 4001.75,3625.79 4041.44,3665.47 U3F.10@4060.95,3665.47 ; J61.2@4094.76,4260 J45.2@4137.52,4260 ; U3F.16@4293.23,3793.43 4294.15,3792.5 4351.16,3792.5 4358.66,3800 v1(4375,3800) 4425.51,3800 C5F.1@4437.09,3788.43 ; J8.2@4318.62,1418.86 v1(4340,1418.86) J25.2@4361.38,1418.86 ; U3C.10@4349.06,2084.53 4368.56,2084.53 4408.25,2124.21 v1(4409.06,2124.21) ; C3C.1@4611.06,2119.37 4614.06,2116.38 v1(4614.06,2059.21) 4614.06,1919.53 C4C.1@4614.21,1919.37 ; C4G.1@5075.79,3830.63 5075.94,3830.47 v1(5075.94,3690.79) 5075.94,3633.62 C3G.1@5078.94,3630.63 ; C5B.1@5252.91,1961.57 5264.49,1950 v2(5315,1950) 5331.34,1950 5338.84,1957.5 5395.85,1957.5 U3B.16@5396.77,1956.57 ; v1(5280.94,3625.79) 5281.75,3625.79 5321.44,3665.47 U3G.10@5340.94,3665.47 ; J33.2@5374.76,4260 J17.2@5417.52,4260 ; U3G.16@5573.23,3793.43 5574.15,3792.5 5631.16,3792.5 5638.66,3800 v1(5655,3800) 5705.51,3800 C5G.1@5717.09,3788.43 ; J37.2@5598.62,1418.86 v2(5620,1418.86) J53.2@5641.38,1418.86 ; U3B.10@5629.06,2084.53 5648.56,2084.53 5688.25,2124.21 v2(5689.06,2124.21) ; C3B.1@5891.06,2119.37 5894.06,2116.38 v2(5894.06,2059.21) 5894.06,1919.53 C4B.1@5894.21,1919.37 ; C4H.1@6355.79,3830.63 6355.94,3830.47 v2(6355.94,3690.79) 6355.94,3633.62 C3H.1@6358.94,3630.63 ; C5A.1@6532.91,1961.57 6544.49,1950 v1(6595,1950) 6611.34,1950 6618.84,1957.5 6675.85,1957.5 U3A.16@6676.77,1956.57 ; v2(6560.94,3625.79) 6561.75,3625.79 6601.44,3665.47 U3H.10@6620.94,3665.47 ; J65.2@6654.76,4260 v2(6676.14,4260) J49.2@6697.52,4260 ; U3H.16@6853.23,3793.43 6854.15,3792.5 6911.16,3792.5 6918.66,3800 v2(6935,3800) 6985.51,3800 C5H.1@6997.09,3788.43 ; J4.2@6878.62,1418.86 J21.2@6921.38,1418.86 ; U3A.10@6909.06,2084.53 6928.56,2084.53 6968.25,2124.21 v1(6969.06,2124.21) ; C3A.1@7171.06,2119.37 7174.06,2116.38 v1(7174.06,2059.21) 7174.06,1919.53 C4A.1@7174.21,1919.37 ; R4.1@7179.53,2820 7179.76,2820.24 7179.76,2869.76 v1(7180,2870) ; C2.1@7746.85,1605 7746.85,1616.81 7785.04,1655 7895.67,1655 7905.67,1645 v1(7910,1645) v1@7914.33,1645 ; C1.1@7751.85,3465 7751.85,3476.81 7785.04,3510 7900.67,3510 7910.67,3500 v1(7915,3500) v1@7919.33,3500 ; U2.6@7970.35,1632.8 7968.88,1634.27 7925.06,1634.27 v1@7914.33,1645 ; U2.5@7970.35,1658.39 7968.88,1656.91 7926.24,1656.91 v1@7914.33,1645 ; U1.6@7975.35,3487.8 7973.88,3489.27 7930.06,3489.27 v1@7919.33,3500 ; U1.5@7975.35,3513.39 7973.88,3511.91 7931.24,3511.91 v1@7919.33,3500 ; U2.2@8139.65,1607.2 8141.12,1608.68 8184.35,1608.68 v1@8195.67,1620 ; U2.3@8139.65,1632.8 8141.12,1631.32 8184.35,1631.32 v1@8195.67,1620 ; U1.2@8144.65,3462.2 8146.12,3463.68 8189.35,3463.68 v1@8200.67,3475 ; U1.3@8144.65,3487.8 8146.12,3486.32 8189.35,3486.32 v1@8200.67,3475 ; v1(8200,1620) v1@8195.67,1620 ; v1(8205,3475) v1@8200.67,3475
  Top Layer w40: D1D.A@2410,1370 2632.28,1370 P6D.2@2672.91,1329.37 ; P6E.2@3177.09,4420.63 3217.72,4380 D1E.A@3440,4380 ; D1C.A@3690,1370 3912.28,1370 P6C.2@3952.91,1329.37 ; P6F.2@4457.09,4420.63 4497.72,4380 D1F.A@4720,4380 ; D1B.A@4970,1370 5192.28,1370 P6B.2@5232.91,1329.37 ; P6G.2@5737.09,4420.63 5777.72,4380 D1G.A@6000,4380 ; D1A.A@6250,1370 6472.28,1370 P6A.2@6512.91,1329.37 ; P6H.2@7017.09,4420.63 7057.72,4380 D1H.A@7280,4380
  other v1: 3060,1418.86 6900,1418.86 2836.14,4260 4116.14,4260 5396.14,4260